# EAGLE board multiple servo shield (EAGLE 5.10)
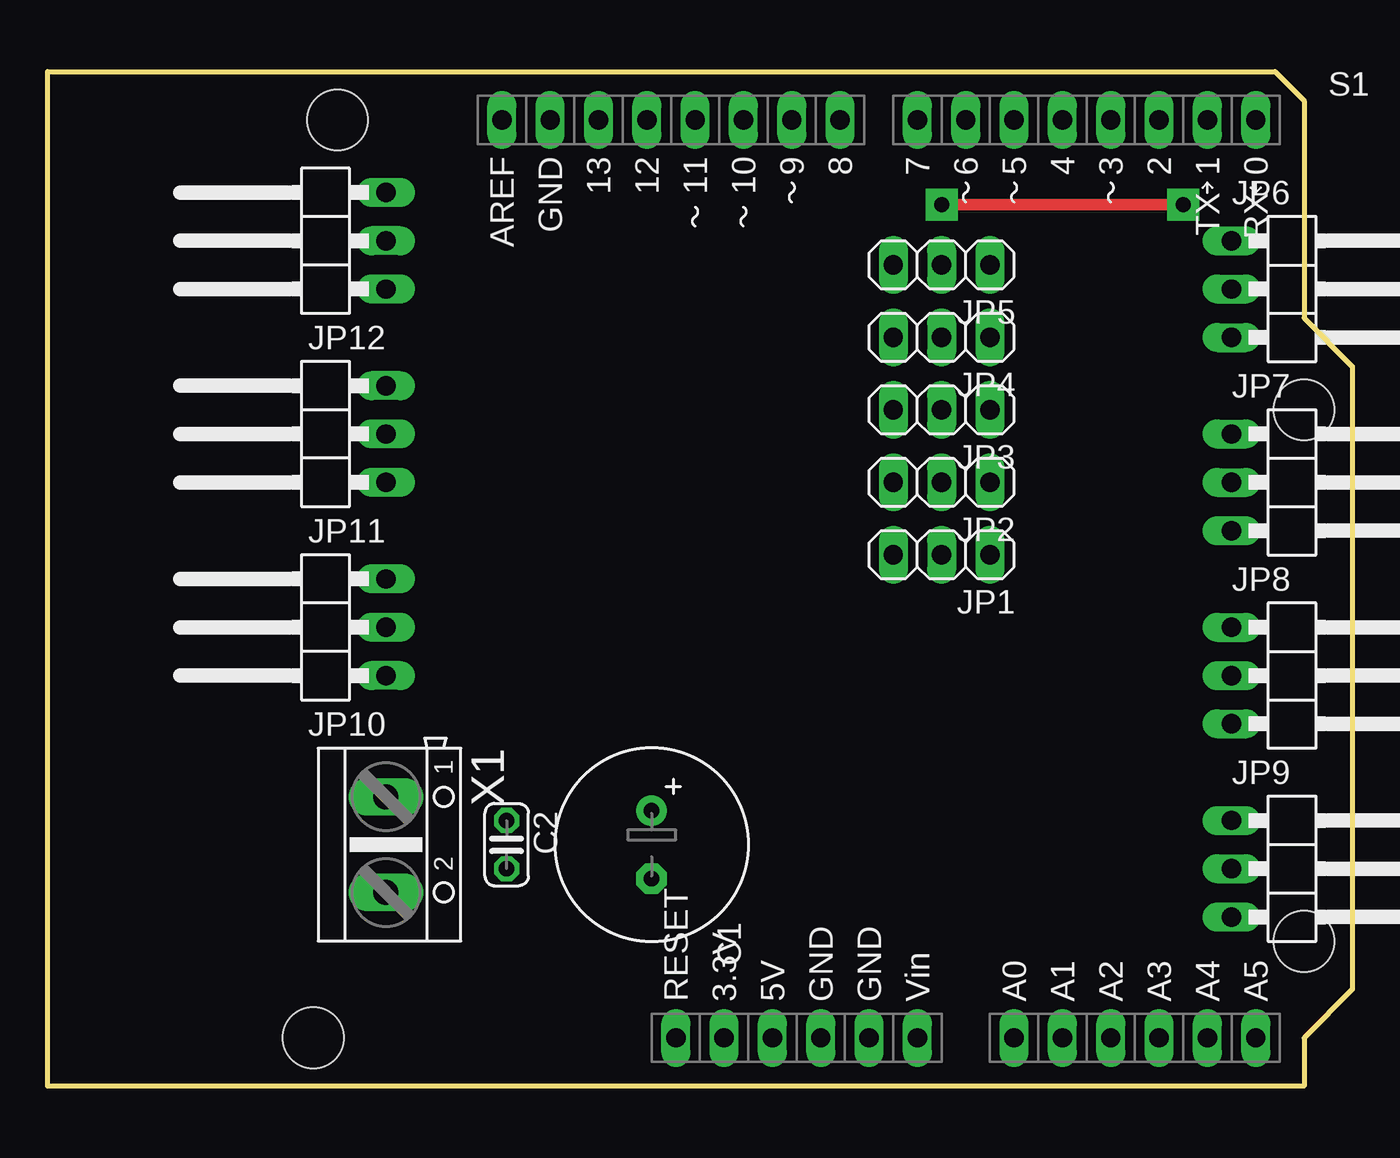
[diagram p0: board, top side]
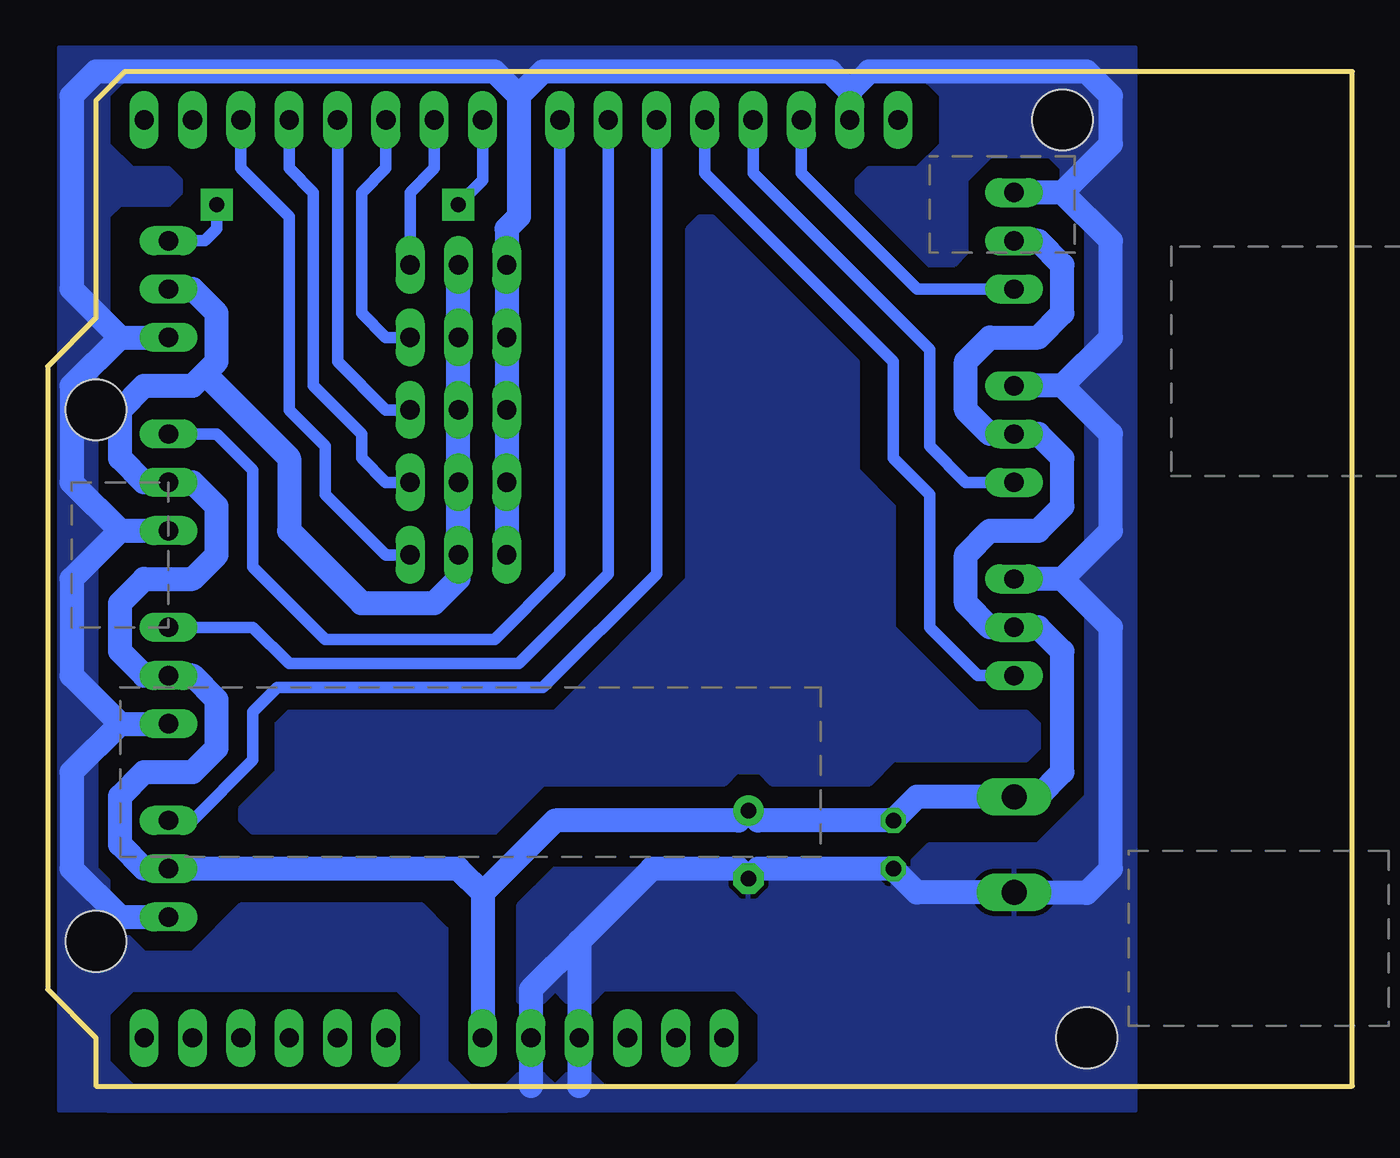
[diagram p1: board, bottom side, seen from below]

Size 68.58 x 53.34 mm. Coordinates in mm from the lower left corner, seen from the top.
Copper layers (1*16): Top 0.035mm / dielectric 1.5mm / Bottom 0.035mm
Design rules "default *": minimum track width 24mil, minimum drill 24mil, track to track 12mil, track to pad 12mil, pad to pad 12mil, via to via 12mil, smd to smd 12mil, copper to edge 0mil, drill to drill 8mil, minimum pad ring 10mil, minimum via ring 8mil, stop-mask expansion 4mil, vias tented up to drill 0mil, thermal gap 10mil

## Footprints (pad centres in the part's own frame; a part is rotated, then mirrored left to right if it is on the bottom)
E3,5-10 = drill 0.813 pad 1.6 round: + -1.778,0 | drill 0.813 pad 1.6 octagon: - 1.778,0
C025-024X044 = drill 0.813 octagon: 1 -1.27,0; 2 1.27,0
1X03 = drill 1.016 long: 1 -2.54,0; 2 0,0; 3 2.54,0
1X03/90 = drill 1.016 long: 1 -2.54,-3.81; 2 0,-3.81; 3 2.54,-3.81
ARDUINO_SHIELD = drill 1.016 long: 0 63.5,50.8; 1 60.96,50.8; 2 58.42,50.8; 3.3V 35.56,2.54; 4 53.34,50.8; 5V 38.1,2.54; 7 45.72,50.8; 8 41.656,50.8; 12 31.496,50.8; 13 28.956,50.8; A0 50.8,2.54; A1 53.34,2.54; A2 55.88,2.54; A3 58.42,2.54; A4 60.96,2.54; A5 63.5,2.54; AREF 23.876,50.8; GND 40.64,2.54; GND@1 43.18,2.54; GND@2 26.416,50.8; RESET 33.02,2.54; VIN 45.72,2.54; ~3 55.88,50.8; ~5 50.8,50.8; ~6 48.26,50.8; ~9 39.116,50.8; ~10 36.576,50.8; ~11 34.036,50.8 | hole 3.2: 66.04,35.56; 66.04,7.62; 15.24,50.8; 13.97,2.54
AK500/2 = drill 1.321 long: 1 -2.515,0; 2 2.515,0

## Placement (x,y rotation side)
C1  1000uF  [E3,5-10]  31.75,12.7 270 top
C2  100nF  [C025-024X044]  24.13,12.7 270 top
JP1  [1X03]  46.99,27.94 180 top
JP2  [1X03]  46.99,31.75 180 top
JP3  [1X03]  46.99,35.56 180 top
JP4  [1X03]  46.99,39.37 180 top
JP5  [1X03]  46.99,43.18 180 top
JP6  [1X03/90]  66.04,41.91 270 top
JP7  [1X03/90]  66.04,31.75 270 top
JP8  [1X03/90]  66.04,21.59 270 top
JP9  [1X03/90]  66.04,11.43 270 top
JP10  [1X03/90]  13.97,24.13 90 top
JP11  [1X03/90]  13.97,34.29 90 top
JP12  [1X03/90]  13.97,44.45 90 top
S1  [ARDUINO_SHIELD]  0,0 0 top
X1  Bateria 6V  [AK500/2]  17.78,12.7 270 top

## Library data of the parts
C1 C2 = rcl
JP1-JP12 = pinhead
S1 = Personal - Modulos
X1 = con-ptr500

## Nets
GND: C1.- C2.2 JP1.3 JP2.3 JP3.3 JP4.3 JP5.3 JP6.3 JP7.3 JP8.3 JP9.3 JP10.3 JP11.3 JP12.3 S1.GND S1.GND@1 S1.GND@2 X1.2
N$1: JP12.1 S1.13
N$2: JP11.1 S1.12
N$3: JP10.1 S1.~11
N$4: JP9.1 S1.~10
N$5: JP8.1 S1.~9
N$6: JP7.1 S1.8
N$7: JP6.1 S1.7
N$8: JP5.1 S1.~6
N$9: JP4.1 S1.~5
N$10: JP3.1 S1.4
N$11: JP2.1 S1.~3
N$12: JP1.1 S1.2
V+: C1.+ C2.1 JP1.2 JP2.2 JP3.2 JP4.2 JP5.2 JP6.2 JP7.2 JP8.2 JP9.2 JP10.2 JP11.2 JP12.2 S1.VIN X1.1

## Tracks (layer width: path | path; a pad name or v marks a point on that pad's centre or on a via)
GND
  Bottom 1.27: 15.24,46.99 JP12.3 | 15.24,46.99 12.7,44.45 12.7,39.37 15.24,36.83 | 15.24,36.83 12.7,34.29 12.7,29.21 15.24,26.67 | 15.24,26.67 12.7,24.13 12.7,11.43 13.97,10.16 17.75,10.16 X1.2 22.89,10.19 C2.2 31.24,11.43 C1.- 32.26,11.43 36.83,11.43 40.64,7.62 | 15.24,36.83 JP11.3 | 15.24,26.67 JP10.3 | 26.42,52.32 S1.GND@2 | 26.42,52.32 25.4,53.34 13.97,53.34 12.7,52.07 12.7,49.53 15.24,46.99 | 64.77,39.37 JP6.3 | 64.77,39.37 67.31,41.91 67.31,52.07 66.04,53.34 45.09,53.34 43.81,52.07 | 26.42,52.32 27.43,53.34 42.55,53.34 43.81,52.07 | 64.77,29.21 JP7.3 | 64.77,29.21 67.31,31.75 67.31,36.83 64.77,39.37 | 64.77,19.05 JP8.3 | 64.77,19.05 67.31,21.59 67.31,26.67 64.77,29.21 | JP9.3 64.77,8.89 67.31,11.43 67.31,16.51 64.77,19.05 | 40.64,7.62 S1.GND 40.64,0 | 43.81,52.07 43.81,45.72 44.45,45.09 JP5.3 JP4.3 JP3.3 JP2.3 JP1.3 | 40.64,7.62 43.18,5.08 S1.GND@1 43.18,0
  pour Bottom: 11.43,54.61 11.43,-1.27 44.45,-1.27 44.45,0 43.81,0.64 42.55,0.64 41.91,0 41.27,0.64 40.01,0.64 39.37,0 32.38,0 31.11,1.27 31.11,3.81 32.38,5.08 39.37,5.08 40.01,4.45 41.27,4.45 41.91,5.08 42.55,4.45 43.81,4.45 43.81,9.53 41.91,11.43 23.5,11.43 22.23,12.7 16.51,12.7 13.97,15.24 13.97,26.04 14.61,26.67 13.97,27.3 13.97,36.2 14.61,36.83 13.97,37.47 13.97,45.72 15.24,46.99 15.24,48.26 15.88,48.9 19.05,48.9 20.32,47.62 20.32,43.81 20.95,43.18 22.23,43.18 26.04,46.99 26.04,47.62 25.4,48.26 22.86,48.26 21.59,49.53 21.59,52.07 22.86,53.34 43.18,53.34 43.81,52.7 44.45,53.34 64.14,53.34 65.41,52.07 65.41,49.53 64.14,48.26 62.23,48.26 61.59,47.62 61.59,46.99 62.23,46.35 64.77,46.35 65.41,45.72 65.41,39.37 66.04,38.73 66.04,29.84 65.41,29.21 66.04,28.57 66.04,19.68 65.41,19.05 66.04,18.41 66.04,11.43 65.41,10.79 65.41,-1.27 67.94,-1.27 67.94,54.61
  pour Bottom: 44.45,0 46.35,0 47.62,1.27 47.62,8.26 48.9,9.53 58.42,9.53 60.96,6.99 63.5,6.99 65.41,8.89 65.41,3.81 64.14,5.08 50.16,5.08 48.9,3.81 48.9,1.27 50.16,0 64.14,0 65.41,1.27 65.41,-1.27 44.45,-1.27
N$1
  Bottom 0.61: S1.13 28.96,48.01 22.86,41.91 JP12.1
N$2
  Bottom 0.61: JP11.1 20.32,31.75 22.23,33.66 22.23,38.73 31.5,48.01 S1.12
N$3
  Bottom 0.61: JP10.1 19.68,21.59 22.23,24.13 22.23,31.11 24.13,33.02 24.13,38.1 34.04,48.01 S1.~11
N$4
  Bottom 0.61: S1.~10 36.58,26.92 42.55,20.95 56.52,20.95 57.78,19.68 57.78,17.14 60.96,13.97 JP9.1
N$5
  Bottom 0.61: JP8.1 57.78,24.13 55.88,22.23 43.81,22.23 39.12,26.92 S1.~9
N$6
  Bottom 0.61: S1.8 41.66,26.92 45.09,23.5 53.98,23.5 57.78,27.3 57.78,32.38 59.69,34.29 JP7.1
N$7  (via drill 0.8 pad 1.68)
  Top 0.61: v46.99,46.35 v59.69,46.35
  Bottom 0.61: v46.99,46.35 45.72,47.62 S1.7 | v59.69,46.35 59.69,45.09 60.33,44.45 JP6.1
N$8
  Bottom 0.61: S1.~6 48.26,48.26 49.53,46.99 JP5.1
N$9
  Bottom 0.61: JP4.1 50.8,39.37 52.07,40.64 52.07,46.99 50.8,48.26 S1.~5
N$10
  Bottom 0.61: S1.4 53.34,38.1 50.8,35.56 JP3.1
N$11
  Bottom 0.61: S1.~3 55.88,48.26 54.61,46.99 54.61,36.83 52.07,34.29 52.07,33.02 50.8,31.75 JP2.1
N$12
  Bottom 0.61: S1.2 58.42,48.26 55.88,45.72 55.88,35.56 53.98,33.66 53.98,31.11 50.8,27.94 JP1.1
N$13
  pour Bottom: 34.92,26.67 34.92,45.09 34.29,45.72 33.66,45.72 26.04,38.1 26.04,32.38 24.13,30.48 24.13,24.13 19.68,19.68 17.14,19.68 16.51,19.05 16.51,17.78 17.14,17.14 24.13,17.14 25.4,15.88 30.48,15.88 31.11,16.51 32.38,16.51 33.02,15.88 42.55,15.88 45.09,13.34 57.78,13.34 58.42,13.97 58.42,14.61 56.52,16.51 56.52,19.05 55.88,19.68 41.91,19.68
V+
  Bottom 1.27: JP12.2 16.51,44.45 15.24,43.18 15.24,40.64 16.51,39.37 19.05,39.37 20.32,38.1 20.32,35.56 19.05,34.29 JP11.2 16.51,34.29 15.24,33.02 15.24,30.48 16.51,29.21 19.05,29.21 20.32,27.94 20.32,25.4 19.05,24.13 JP10.2 16.51,24.13 15.24,22.86 15.24,16.51 16.51,15.24 17.75,15.24 X1.1 22.89,15.21 C2.1 31.24,13.97 C1.+ 32.26,13.97 41.91,13.97 45.72,10.16 | JP6.2 60.96,41.91 59.69,40.64 59.69,38.1 60.33,37.47 | 60.33,37.47 60.96,36.83 63.5,36.83 64.77,35.56 64.77,33.02 63.5,31.75 JP7.2 60.96,31.75 59.69,30.48 59.69,27.94 60.96,26.67 63.5,26.67 64.77,25.4 64.77,22.86 63.5,21.59 JP8.2 60.96,21.59 59.69,20.32 59.69,17.78 60.96,16.51 63.5,16.51 64.77,15.24 64.77,12.7 63.5,11.43 JP9.2 46.99,11.43 45.72,10.16 | 45.72,10.16 S1.VIN | 60.33,37.47 55.88,33.02 55.88,29.21 52.07,25.4 48.26,25.4 46.99,26.67 JP1.2 JP2.2 JP3.2 JP4.2 JP5.2